# Altium PCB SurfaceControlSystem.PcbDoc
Units mil, origin at the board's own origin, x right, y up, seen from the top; angles counter-clockwise.
Board outline 3543.31 x 5842.52 mil, 2 copper layers (Top Layer, Bottom Layer); 136 components, 62 nets, 417 pads, 47 vias.
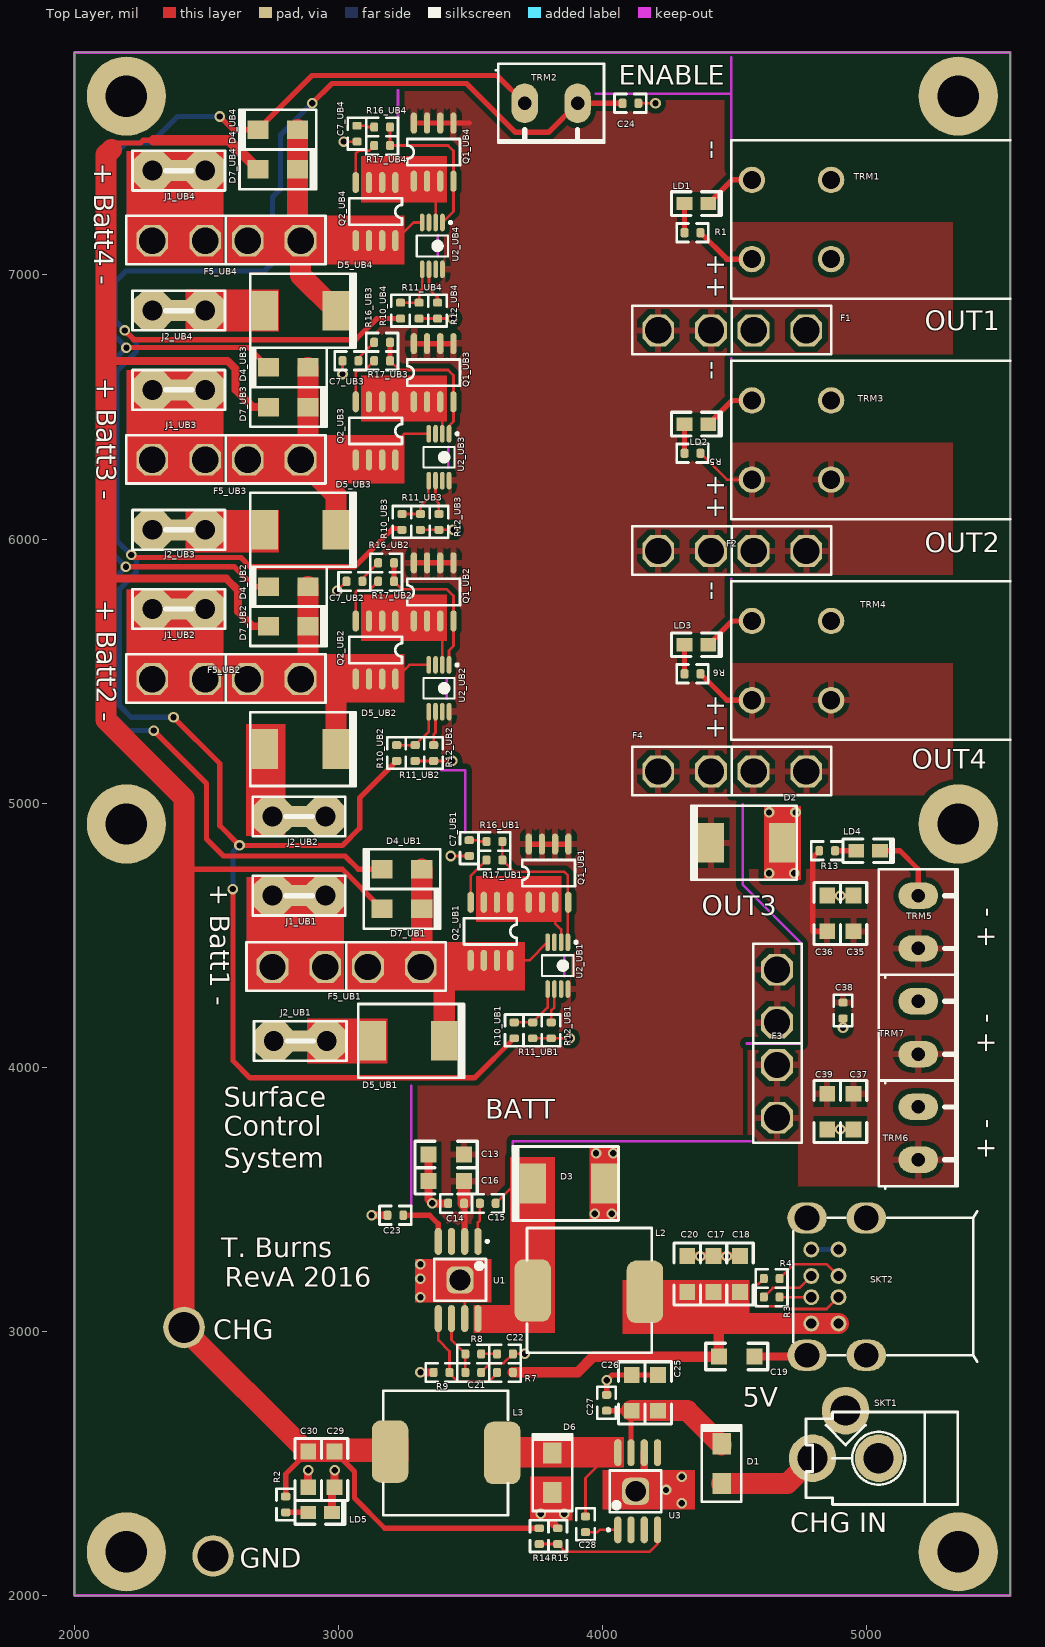
[diagram p0: Top Layer view]
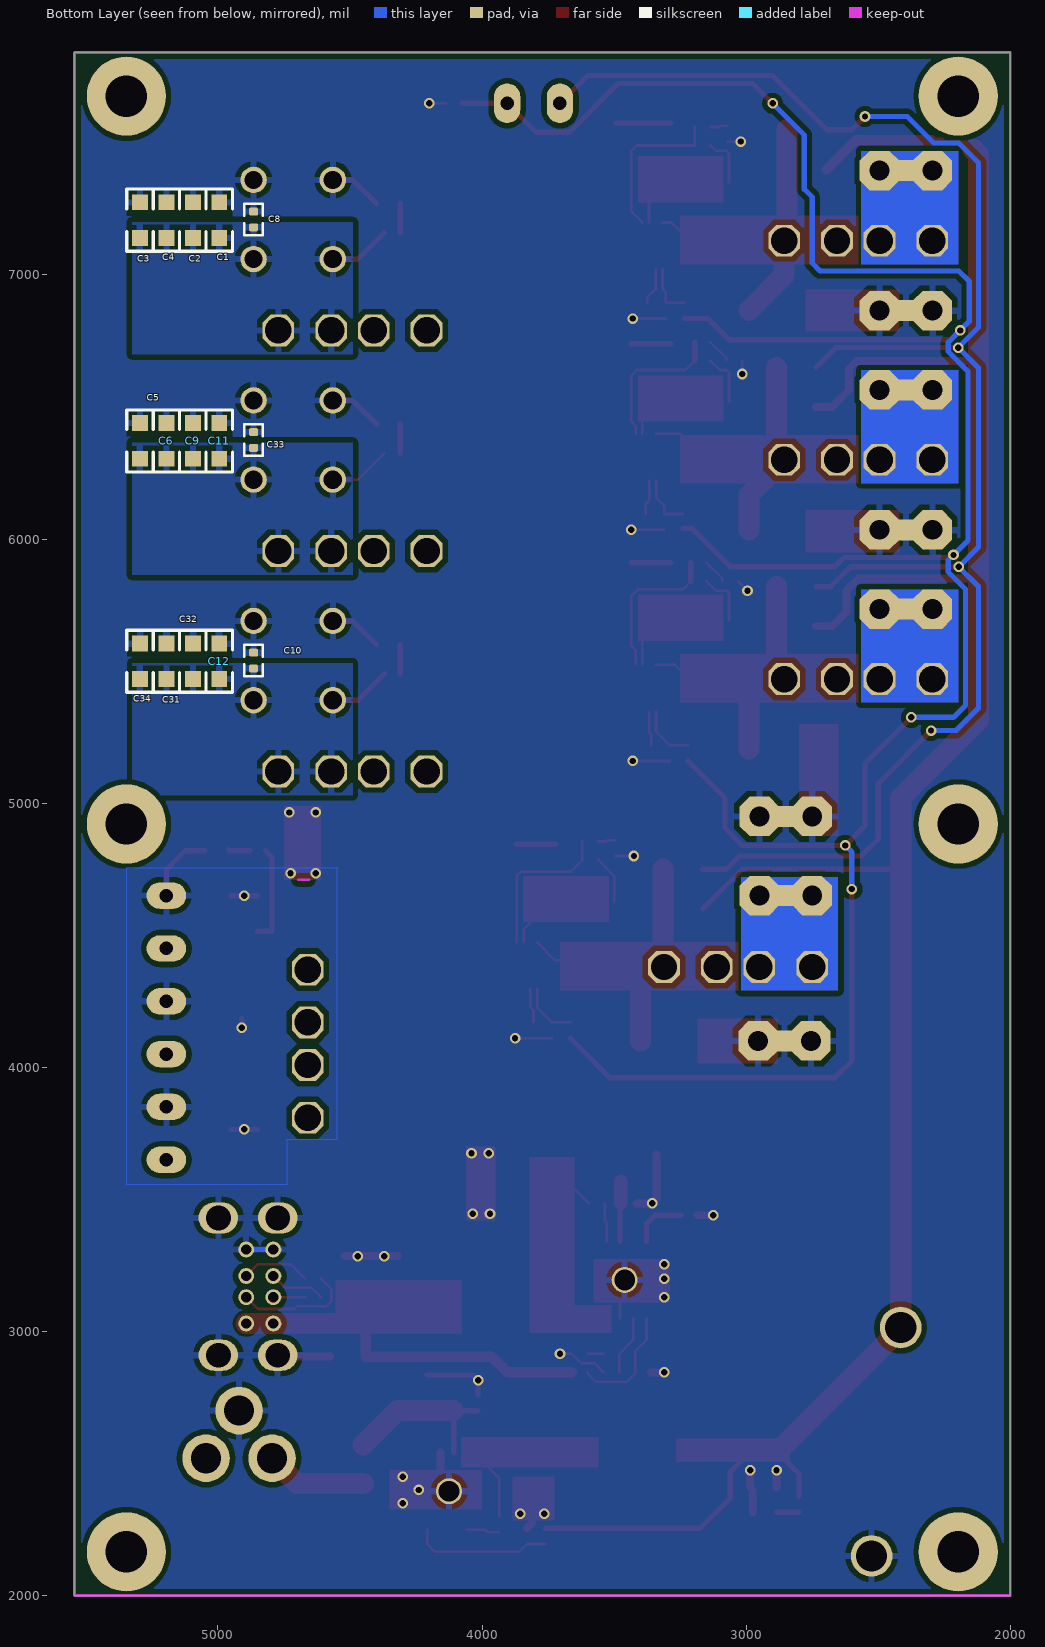
[diagram p1: Bottom Layer view, seen from below]

## Layer stack, top to bottom
Top Layer: signal copper 1.4
Dielectric: core 12.6, FR-4, Dk 4.8
Bottom Layer: signal copper 1.4

## Board outline
2000,2000 2000,7842.52 5543.31,7842.52 5543.31,2000

## Design rules (kind name [scope] priority, off if disabled: settings)
Clearance Clearance_poly [InPoly] p1: gap=20
Clearance [All] p2: gap=7
ComponentClearance [All] p1 off: gap=10 collisioncheckmode=3 verticalgap=10 showdistances=FALSE
HoleSize [All] p1: absolutevalues=TRUE maxlimit=300 minlimit=24 maxpercent=80.000 minpercent=20.000
MinimumAnnularRing [All] p1: minimumring=8
PlaneClearance [All] p1: clearance=12
PlaneConnect [All] p1: planeconnectstyle=Relief reliefexpansion=25 reliefentries=4 reliefconductorwidth=10 reliefairgap=10
PolygonConnect PolygonConnect_via [IsVia] p1: connectstyle=Direct reliefconductorwidth=10 reliefentries=4 polygonreliefangle="90 Angle"
PolygonConnect [All] p2: connectstyle=Relief reliefconductorwidth=25 reliefentries=4 polygonreliefangle="90 Angle"
RoutingVias [All] p1: holewidth=24 width=40 viastyle="Through Hole" minholewidth=24 minwidth=35 maxholewidth=28 maxwidth=50
SolderMaskExpansion [All] p1: expansion=4
TestPointUsage [All] p1: valid=0 allowmultiple=FALSE
Testpoint [All] p1: side=3 testpointundercomponent=TRUE minsize=40 maxsize=100 preferedsize=60 minholesize=0 maxholesize=40 preferedholesize=32 testpointgrid=1 style=297 order=0-112345678
Width [All] p1: maxlimit=300 minlimit=10 preferedwidth=10
15 further rules are at their usual default settings.

## Classes and differential pairs
channel class SCS_Battery_RevA: UB1 UB2 UB3 UB4

## Components (designator, comment, footprint, x,y, rotation, side; value= is the part's Value field where it differs from the comment)
C1 "10UF 25V" 1206 4995,7140 r90 bottom
C2 "10UF 50V" 1206 5095,7140 r90 bottom
C3 "10UF 25V" 1206 5295,7140 r90 bottom
C4 "10UF 25V" 1206 5195,7140 r90 bottom
C5 "10UF 25V" 1206 5295.02,6304.29 r90 bottom
C6 "10UF 25V" 1206 5195.02,6304.29 r90 bottom
C7_UB1 "10NF 50V" 0603 3495,4860 r270 top (schematic designator C7)
C7_UB2 "10NF 50V" 0603 3090,5840 r180 top (schematic designator C7)
C7_UB3 "10NF 50V" 0603 3075,6675 r180 top (schematic designator C7)
C7_UB4 "10NF 50V" 0603 3070,7565 r270 top (schematic designator C7)
C8 "100nF 50V" 0603 4865,7180 r90 bottom
C9 "10UF 25V" 1206 5095.02,6304.29 r90 bottom
C10 "100nF 50V" 0603 4865,5510 r90 bottom
C11 "10UF 25V" 1206 4995.02,6304.29 r90 bottom
C12 "10UF 25V" 1206 4995,5470 r90 bottom
C13 "10UF 25V" 1206 3475,3670 r180 top
C14 "10NF 50V" 0603 3475,3485 r180 top
C15 "100nF 50V" 0603 3535,3485 r0 top
C16 "10UF 25V" 1206 3475,3570 r180 top
C17 "10UF 25V" 1206 4420,3150 r90 top
C18 "10UF 25V" 1206 4520,3150 r90 top
C19 "10UF 25V" 1206 4440,2905 r0 top
C20 "10UF 25V" 1206 4320,3150 r90 top
C21 "22PF 100V" 0603 3480,2845 r0 top
C22 "1nF 50V" 0603 3600,2915 r0 top
C23 "10NF 50V" 0603 3245,3440 r180 top
C24 "100nF 50V" 0603 4075,7650 r0 top
C25 "10UF 25V" 1206 4210,2700 r90 top
C26 "10UF 25V" 1206 4110,2700 r90 top
C27 "100nF 50V" 0603 4015,2700 r90 top
C28 "10NF 50V" 0603 3935,2240 r90 top
C29 "10UF 25V" 1206 2985,2545 r270 top
C30 "10UF 25V" 1206 2885,2545 r270 top
C31 "10UF 25V" 1206 5195,5470 r90 bottom
C32 "10UF 25V" 1206 5095,5470 r90 bottom
C33 "100nF 50V" 0603 4865,6345 r90 bottom
C34 "10UF 25V" 1206 5295.01,5470.01 r90 bottom
C35 "10UF 25V" 1206 4950,4515 r90 top
C36 "10UF 25V" 1206 4850,4515 r90 top
C37 "10UF 25V" 1206 4950,3900 r270 top
C38 "100nF 50V" 0603 4910,4245 r270 top
C39 "10UF 25V" 1206 4850,3900 r270 top
D1 "DIODE_SS14" DO-214AC 4450,2425 r270 top
D2 "TVS 15V" DO-214AB 4545,4850 r0 top
D3 "DIODE_SSC54" DO-214AB 3870,3560 r0 top
D4_UB1 "DIODE_SS14" DO-214AC 3315,4750 r0 top (schematic designator D4)
D4_UB2 "DIODE_SS14" DO-214AC 2885,5820 r0 top (schematic designator D4)
D4_UB3 "DIODE_SS14" DO-214AC 2885,6650 r0 top (schematic designator D4)
D4_UB4 "DIODE_SS14" DO-214AC 2845,7550 r0 top (schematic designator D4)
D5_UB1 "TVS 15V" DO-214AB 3265,4100 r180 top (schematic designator D5)
D5_UB2 "TVS 15V" DO-214AB 2855,5205 r180 top (schematic designator D5)
D5_UB3 "TVS 15V" DO-214AB 2855,6035 r180 top (schematic designator D5)
D5_UB4 "TVS 15V" DO-214AB 2855,6865 r180 top (schematic designator D5)
D6 "DIODE_SS14" DO-214AC 3810,2390 r270 top
D7_UB1 "DIODE_SS14" DO-214AC 3165,4600 r180 top (schematic designator D7)
D7_UB2 "DIODE_SS14" DO-214AC 2735,5670 r180 top (schematic designator D7)
D7_UB3 "DIODE_SS14" DO-214AC 2735,6500 r180 top (schematic designator D7)
D7_UB4 "DIODE_SS14" DO-214AC 2695,7400 r180 top (schematic designator D7)
F1 "BLADE FUSE" FUSEHOLDER_BLADE 4210,6790 r0 top
F2 "BLADE FUSE" FUSEHOLDER_BLADE 4210,5955 r0 top
F3 "BLADE FUSE" FUSEHOLDER_BLADE 4660,4370 r270 top
F4 "BLADE FUSE" FUSEHOLDER_BLADE 4210,5120 r0 top
F5_UB1 "BLADE FUSE" FUSEHOLDER_BLADE 2750,4380 r0 top (schematic designator F5)
F5_UB2 "BLADE FUSE" FUSEHOLDER_BLADE 2295,5470 r0 top (schematic designator F5)
F5_UB3 "BLADE FUSE" FUSEHOLDER_BLADE 2295,6300 r0 top (schematic designator F5)
F5_UB4 "BLADE FUSE" FUSEHOLDER_BLADE 2295,7130 r0 top (schematic designator F5)
J1_UB1 "5mm Pitch 6.3mm SPADE" CON_5mm_6.3MM_SPADE 2950,4650 r90 top (schematic designator J1)
J1_UB2 "5mm Pitch 6.3mm SPADE" CON_5mm_6.3MM_SPADE 2495,5735 r90 top (schematic designator J1)
J1_UB3 "5mm Pitch 6.3mm SPADE" CON_5mm_6.3MM_SPADE 2495,6565 r90 top (schematic designator J1)
J1_UB4 "5mm Pitch 6.3mm SPADE" CON_5mm_6.3MM_SPADE 2495,7395 r90 top (schematic designator J1)
J2_UB1 "5mm Pitch 6.3mm SPADE" CON_5mm_6.3MM_SPADE 2955,4100 r90 top (schematic designator J2)
J2_UB2 "5mm Pitch 6.3mm SPADE" CON_5mm_6.3MM_SPADE 2950,4950 r90 top (schematic designator J2)
J2_UB3 "5mm Pitch 6.3mm SPADE" CON_5mm_6.3MM_SPADE 2495,6035 r90 top (schematic designator J2)
J2_UB4 "5mm Pitch 6.3mm SPADE" CON_5mm_6.3MM_SPADE 2495,6865 r90 top (schematic designator J2)
L2 "4.7uH 6A2" Wurth744771156 3950,3155 r270 top
L3 "56uH 2A" Wurth744771156 3405,2540 r90 top
LD1 "Green LED 0805" 0805DIODE 4400,7270 r180 top
LD2 "Green LED 0805" 0805DIODE 4400,6435 r180 top
LD3 "Green LED 0805" 0805DIODE 4400,5600 r180 top
LD4 "Green LED 0805" 0805DIODE 5050,4820 r180 top
LD5 "Green LED 0805" 0805DIODE 2975,2315 r180 top
Q1_UB1 "N Channel FET" SO-8 3720,4625 r90 top (schematic designator Q1)
Q1_UB2 "N Channel FET" SO-8 3285,5690 r90 top (schematic designator Q1)
Q1_UB3 "N Channel FET" SO-8 3285,6520 r90 top (schematic designator Q1)
Q1_UB4 "N Channel FET" SO-8 3285,7355 r90 top (schematic designator Q1)
Q2_UB1 "N Channel FET" SO-8 3650,4625 r270 top (schematic designator Q2)
Q2_UB2 "N Channel FET" SO-8 3215,5690 r270 top (schematic designator Q2)
Q2_UB3 "N Channel FET" SO-8 3215,6520 r270 top (schematic designator Q2)
Q2_UB4 "N Channel FET" SO-8 3215,7350 r270 top (schematic designator Q2)
R1 "1K 1%" 0603 4310,7160 r0 top
R2 "1K 1%" 0603 2800,2315 r90 top
R3 "220R 1%" 0603 4610,3130 r0 top
R4 "220R 1%" 0603 4670,3200 r180 top
R5 "1K 1%" 0603 4310,6325 r0 top
R6 "1K 1%" 0603 4310,5490 r0 top
R7 "10K2 1%" 0603 3600,2845 r0 top
R8 "45K3R 1%" 0603 3540,2915 r180 top
R9 "1K96 1%" 0603 3420,2845 r180 top
R10_UB1 "1K 1%" 0603 3665,4110 r90 top (schematic designator R10)
R10_UB2 "1K 1%" 0603 3220,5160 r90 top (schematic designator R10)
R10_UB3 "1K 1%" 0603 3240,6035 r90 top (schematic designator R10)
R10_UB4 "1K 1%" 0603 3235,6835 r90 top (schematic designator R10)
R11_UB1 "100K 1%" 0603 3735,4110 r90 top (schematic designator R11)
R11_UB2 "100K 1%" 0603 3290,5160 r90 top (schematic designator R11)
R11_UB3 "100K 1%" 0603 3310,6035 r90 top (schematic designator R11)
R11_UB4 "100K 1%" 0603 3305,6835 r90 top (schematic designator R11)
R12_UB1 "1K 1%" 0603 3805,4110 r90 top (schematic designator R12)
R12_UB2 "1K 1%" 0603 3360,5160 r90 top (schematic designator R12)
R12_UB3 "1K 1%" 0603 3380,6035 r90 top (schematic designator R12)
R12_UB4 "1K 1%" 0603 3375,6835 r90 top (schematic designator R12)
R13 "1K 1%" 0603 4880,4820 r180 top
R14 "1K 1%" 0603 3760,2195 r90 top
R15 "590R 1%" 0603 3830,2255 r270 top
R16_UB1 "10K 1%" 0603 3560,4855 r0 top (schematic designator R16)
R16_UB2 "10K 1%" 0603 3150,5910 r0 top (schematic designator R16)
R16_UB3 "10K 1%" 0603 3135,6745 r0 top (schematic designator R16)
R16_UB4 "10K 1%" 0603 3135,7560 r0 top (schematic designator R16)
R17_UB1 "10R 1%" 0603 3620,4785 r180 top (schematic designator R17)
R17_UB2 "10R 1%" 0603 3210,5840 r180 top (schematic designator R17)
R17_UB3 "10R 1%" 0603 3195,6675 r180 top (schematic designator R17)
R17_UB4 "10R 1%" 0603 3195,7490 r180 top (schematic designator R17)
SKT1 "DC Socket" SKT_PWR 4795,2520 r180 top
SKT2 "USB A Double Socket" USB_A_DoubleSocket 4790,3030 r0 top
TRM1 "2way screw terminal, High current" TERM_2POS_HORIZ_7.62MM 4865,7060 r90 top locked
TRM2 "Wurth 2way screw terminal" TERM_2POS_HORIZ_5.08MM 3705,7650 r0 top
TRM3 "2way screw terminal, High current" TERM_2POS_HORIZ_7.62MM 4865,6225 r90 top locked
TRM4 "2way screw terminal, High current" TERM_2POS_HORIZ_7.62MM 4865,5390 r90 top locked
TRM5 "Wurth 2way screw terminal" TERM_2POS_HORIZ_5.08MM 5195,4450 r90 top
TRM6 "Wurth 2way screw terminal" TERM_2POS_HORIZ_5.08MM 5195,3650 r90 top
TRM7 "Wurth 2way screw terminal" TERM_2POS_HORIZ_5.08MM 5195,4050 r90 top
U1 "TPS54531DDA" PSOP-8 3460,3195 r270 top
U2_UB1 "LTC4359CMS8#PBF" TSOP65P490X110-8M 3830,4385 r270 top (schematic designator U2)
U2_UB2 "LTC4359CMS8#PBF" TSOP65P490X110-8M 3380,5435 r270 top (schematic designator U2)
U2_UB3 "LTC4359CMS8#PBF" TSOP65P490X110-8M 3380,6310 r270 top (schematic designator U2)
U2_UB4 "LTC4359CMS8#PBF" TSOP65P490X110-8M 3355,7110 r270 top (schematic designator U2)
U3 "Buck Reg" PSOP-8 4125,2395 r90 top

## Footprints (in the part's own frame and the unit in brackets; to place one, negate y for a bottom-side part, rotate by r counter-clockwise, add the part's x,y. Pads: shape width x height; smd on the part's side, far side on the other; paste and mask are expansions set on the pad)
0603 [mil]
  rrect50% 30x35 smd: 1(0,0) 2(60,0)
  silkscreen extent -30,-35 90,35
0805DIODE [mil]
  rect 60x50 smd: A(90,0) K(0,0)
  silkscreen extent -50,-45 140,45
1206 [mil]
  rect 60x60 smd: 1(0,0) 2(135,0)
  silkscreen extent -50,-50 185,50
CON_5mm_6.3MM_SPADE [mil]
  oct 150x150 hole 75: 1(0,200) 1(0,0)
  rect 80x200 smd: 1(0,100)
  rect 80x200 smd far side: 1(0,100)
  silkscreen extent -75,-75 75,275
DO-214AB [mil]
  rect 100x150 smd: A(135,0) K(-135,0)
  silkscreen extent -210,-140 190,140
DO-214AC [mil]
  rect 80x70 smd: A(0,0) K(-150,0)
  silkscreen extent -220,-75 70,75
FUSEHOLDER_BLADE [mil]
  oct 120x120 hole 100: 1(0,0) 1(200,0) 2(361.22,0) 2(561.22,0)
  silkscreen extent -98,-90 656,94
PSOP-8 [mm]
  oval 2.6x0.7 smd: 1(-3.711,1.717) 2(-3.711,0.447) 3(-3.711,-0.823) 4(-3.711,-2.093) 5(3.711,-2.093) 6(3.711,-0.823) 7(3.711,0.447) 8(3.711,1.717)
  rrect50% 2.6x2.6 smd: 9(0,0)
  silkscreen extent -3.84,-2.47 1.99,2.74
SKT_PWR [mil]
  round 180 hole 114: COM(-250,0) PIN(0,0) SW(-125,-180)
  silkscreen extent -550,-175 25,175
SO-8 [mil]
  oval 80x24 smd: 1(0,0) 2(0,-50) 3(0,-100) 4(0,-150) 5(220,-150) 6(220,-100) 7(220,-50) 8(220,0)
  silkscreen extent 60,-175 160,25
TERM_2POS_HORIZ_5.08MM [mil]
  oval 100x150 hole 51: 1(0,0) 2(200,0)
  silkscreen extent -110,-150 300,150
TERM_2POS_HORIZ_7.62MM [mm]
  round 2.54 hole 1.75: 1(0,7.62) 1(0,0) 2(7.62,0) 2(7.62,7.62)
  silkscreen extent -3.81,-17.23 11.43,9.62
TSOP65P490X110-8M [mm] "TSOP, 8-Leads, Body 3.0x3.0mm (max), Pitch 0.65mm, IPC Low Density"
  oval 1.7x0.45 smd: 1(-2.25,0.975) 2(-2.25,0.325) 3(-2.25,-0.325) 4(-2.25,-0.975) 5(2.25,-0.975) 6(2.25,-0.325) 7(2.25,0.325) 8(2.25,0.975)
  silkscreen extent -2.37,-1.5 1,1.88, body extent -1.5,-1.5 1.5,1.5, height 1.1
USB_A_DoubleSocket [mil]
  round 60 hole 39: 1(0,0) 2(0,100) 3(0,180) 4(0,280) 5(103.15,0) 6(103.15,100) 7(103.15,180) 8(103.15,280)
  oval 150x118.11 hole 94: 9(208.15,-120) 10(-16.26,-120) 11(-16.26,400) 12(208.15,400)
  silkscreen extent -68,-145 628,425
Wurth744771156 [mm]
  rrect50% 6x3.5 smd: 1(0,-5.461) 2(0.127,5.334)
  silkscreen extent -6.01,-6.01 5.99,5.99

## Part data
C1 C2 C3 C4 C13 C16 C17 C18 C19 C20 C25 C29 C30 C31 C32 C35 C36 C37 C39: library part CAP_10UF_50V_10%_1206, "CAP CER 10UF 50V 10% X5R 1206"
C5 C33 C34: library part CAP_220UF_35V_20%, "CAP CER 220UF 35V 20%"
C6 C9 C11 C12: library part CAP_10UF_25V_10%_1206, "CAP CER 10UF 25V 10% X5R 1206"
C7_UB1 C7_UB2 C7_UB3 C7_UB4 C14 C23 C26 C28: library part CAP_10NF_50V_10%_0603, "CAP CER 10NF 50V 10% X7R 0603"
C8 C10 C15 C24 C27 C38: library part CAP_100NF_50V_10%_0603, "CAP CER 100nF 50V 10% X7R 0603"
C21: library part CAP_22PF_100V_5%_0603, "CAP CER 22PF 100V 5% NP0 0603"
C22: library part CAP_1NF_50V_10%_0603, "CAP CER 1nF 50V 10% X7R 0603"
D1 D4_UB1 D4_UB2 D4_UB3 D4_UB4 D6: "Schottky Diode, 1A, 40V SS14"
D2: library part DIODE_TVS_SMCJ15A, "TVS Diode, 15V"
D3: "Schottky Diode, 5A, 40V SSC54, DO214AB"
D5_UB1 D5_UB2 D5_UB3 D5_UB4 D7_UB1 D7_UB2 D7_UB3 D7_UB4: library part DIODE_SSC54, "Schottky Diode, 5A, 40V SSC54, DO214AB"
F1 F2 F3 F4 F5_UB1 F5_UB2 F5_UB3 F5_UB4: library part FUSE_BLADE_500V_30A_PCB, "FUSE CLIP BLADE 500V 30A PCB"
J1_UB1 J1_UB2 J1_UB3 J1_UB4 J2_UB1 J2_UB2 J2_UB3 J2_UB4: library part CON_5mm_6.3MM_SPADE, "CON_5mm_6.3MM_SPADE"
L2: library part IND_4.7uH_6A2, "FIXED IND 4.7UH 6.2A 34 MOHM"
L3: library part IND_56uH_2.01A, "FIXED IND 56UH 2.01A 110 MOHM"
LD1 LD2 LD3 LD4 LD5: library part LED_Green_0805, "WL-SMCW SMD CHIP LED WATERCLEAR"
Q1_UB1 Q1_UB2 Q1_UB3 Q1_UB4 Q2_UB1 Q2_UB2 Q2_UB3 Q2_UB4: library part Q_STS26N3LLH6, "MOSFET N-CH 30V 26A LFPAK"
R1 R2 R5 R9 R13: library part RES_1K96_1%_0603, "Resistor, 1K96, 1%, 0603"
R3 R4: library part RES_220R_1%_0603, "Resistor, 220R, 1%, 0603"
R6 R10_UB1 R10_UB2 R10_UB3 R10_UB4 R12_UB1 R12_UB2 R12_UB3 R12_UB4 R14: library part RES_1K_1%_0603, "Resistor, 1K, 1%, 0603"
R7: library part RES_10K2_1%_0603, "Resistor, 10K2, 1%, 0603"
R8: library part RES_45K3_1%_0603, "Resistor, 45K3, 1%, 0603"
R11_UB1 R11_UB2 R11_UB3 R11_UB4: library part RES_100K_1%_0603, "Resistor, 100K, 1%, 0603"
R15: library part RES_590R_1%_0603, "Resistor, 590R, 1%, 0603"
R16_UB1 R16_UB2 R16_UB3 R16_UB4: library part RES_10K_1%_0603, "Resistor, 10K, 1%, 0603"
R17_UB1 R17_UB2 R17_UB3 R17_UB4: library part RES_10R_1%_0603, "Resistor, 10R, 1%, 0603"
SKT1: library part SOCKET_DC
SKT2: library part USB_A_Double
TRM1 TRM3 TRM4: library part TRM_2way_ScrewTerminal_7.62mm, "TERM BLOCK 2POS HORIZ 7.62MM T/H"
TRM2 TRM5 TRM6 TRM7: library part TRM_2way_ScrewTerminal, "TERM BLOCK 2POS HORIZ 5.08MM T/H"
U1: library part IC_SMPS_TPS54531, "SMPS"
U2_UB1 U2_UB2 U2_UB3 U2_UB4: library part IC_LTC4359, "Ideal Diode Controller"
U3: library part IC_REG_LM22675, "IC REG BUCK 5V 1A 8SOPWRPAD"

## Free pads (board coordinates)
  round 157.48 hole 118.11: 0(2415,3015) 0(2525,2150)
  round 98.43 hole 78.74: 0(3460,3195) 0(4125,2395)
  round 300 hole 157 paste+0: ""(2196.85,2165.35) ""(2196.85,4921.26) ""(2196.85,7677.17) ""(5346.46,2165.35) ""(5346.46,4921.26) ""(5346.46,7677.17)

## Via types
v1: diameter 40, hole 24, Top Layer to Bottom Layer, tented both sides, 47 vias

## Nets (pads, with @x,y where several pads share a name; then routed paths per layer and width w, separated by ;. In a path a pad name is that pad's centre, name@x,y a point inside that pad or via, vN(x,y) a via of type N, cw(c..) or ccw(c..) an arc to the next point about the centre after c; other vN are vias at no path point)
5V: C17.1 C18.1 C19.1 C20.1 L2.2 R7.2 SKT2.1 SKT2.5 | length 1538
  Top Layer w40: R7.2 3905,2845 3965,2905 C19.1 4440,3030 ; C20.1 C17.1 C18.1
  Top Layer w80: 4485,3030 SKT2.1 SKT2.5
BATT_DIODE: D4_UB1.K D4_UB2.K D4_UB3.K D4_UB4.K TRM2.1 | length 6569
  Top Layer w20: v1(2195,5895) 2605,5895 2617.5,5882.5 ; v1(2196.85,6725) 2660,6725 D4_UB3.K ; v1(2300,5275) 2500,5075 2500,4865 2565,4800 3025,4800 3075,4750 D4_UB1.K ; v1(2550,7600) 2600,7550 D4_UB4.K 2900,7755 3600,7755 TRM2.1 ; 2610,5890 2617.5,5882.5 ; D4_UB2.K 2680,5820 2617.5,5882.5
  Bottom Layer w20: v1(2300,5275) 2205,5275 2120,5360 2120,5820 v1(2195,5895) 2120,5970 2120,6648.15 v1(2196.85,6725) 2120,6801.85 2120,7425 2195,7500 2290,7500 2390,7600 v1(2550,7600)
BATT_EN: C24.1 R10_UB1.1 R10_UB2.1 R10_UB3.1 R10_UB4.1 TRM2.2 | length 10129.4
  Top Layer w20: v1(2190,6790) 2225,6755 3065,6755 3145,6835 R10_UB4.1 ; v1(2215,5940) 2225,5930 2630,5930 2665,5895 3060,5895 3205,6040 R10_UB3.1@3240,6040 ; v1(2375,5325) 2550,5150 2550,4915 v1(2625,4840) 3015,4840 3080,4905 3080,5020 R10_UB2.1 ; v1(2600,4675) 2600,4025 2665,3960 3515,3960 R10_UB1.1 ; v1(2900,7650) 2975,7725 3485,7725 3670,7540 3795,7540 TRM2.2 C24.1
  Bottom Layer w20: v1(2375,5325) 2215,5325 2170,5370 2170,5810 2235,5875 2235,5920 v1(2215,5940) 2160,5995 2160,6635 2235,6710 2235,6745 v1(2190,6790) 2155,6825 2155,6975 2195,7015 2720,7015 2750,7045 2750,7295 2780,7325 2780,7530 v1(2900,7650) ; v1(2600,4675) 2600,4815 v1(2625,4840)
CHG-FB: R14.1 R15.2 U3.4 | length 525.6
  Top Layer w10: R14.1 R15.2 3859.65,2165.35 4177.32,2165.35 4207.41,2195.45 U3.4
CHG_IN: C25.1 C26.1 C27.1 D1.K U3.7 | length 648.8
  Top Layer w20: C27.1 C26.1 4107.41,2697.41 U3.7
  Top Layer w80: C26.1 C25.1 4320,2700 D1.K@4450,2570
GND: C1.2 C2.2 C3.2 C4.2 C5.2 C6.2 C7_UB1.2 C7_UB2.2 C7_UB3.2 C7_UB4.2 C8.2 C9.2 C10.2 C11.2 C12.2 C13.2 C14.2 C16.2 C17.2 C18.2 C19.2 C20.2 C21.2 C22.2 C23.2 C24.2 C25.2 C26.2 C27.2 C29.2 C30.2 C31.2 C32.2 C33.2 C34.2 C35.2 C36.2 C37.2 C38.2 C39.2 D2.A D3.A D5_UB1.A D5_UB2.A D5_UB3.A D5_UB4.A D6.A J2_UB1.1 J2_UB2.1 J2_UB3.1 J2_UB4.1 LD1.K LD2.K LD3.K LD4.K LD5.K pad.0@2525,2150 pad.0@3460,3195 pad.0@4125,2395 R9.2 R11_UB1.1 R11_UB2.1 R11_UB3.1 R11_UB4.1 R12_UB1.1 R12_UB2.1 R12_UB3.1 R12_UB4.1 R15.1 SKT1.SW SKT2.4 SKT2.8 SKT2.9 SKT2.10 SKT2.11 SKT2.12 TRM1.2 TRM3.2 TRM4.2 TRM5.2 TRM6.2 TRM7.2 U1.7 U1.9 U3.6 U3.9 | length 3863.4
  Top Layer w10: v1(2995,5805) C7_UB2.2 ; v1(3015,6625) C7_UB3.2 ; v1(3020,7505) C7_UB4.2 ; R11_UB2.1 R12_UB2.1 v1(3430,5160) ; R11_UB4.1 R12_UB4.1 v1(3430,6835) ; R11_UB3.1 R12_UB3.1 v1(3435,6035) ; v1(3425,4800) C7_UB1.2 ; U1.7 3477.59,3147.59 U1.9@3480,3150 ; C21.2 3575,2880 3625,2880 C22.2 v1(3705,2915) ; R11_UB1.1 R12_UB1.1 v1(3875,4110) ; C24.2 v1(4200,7650)
  Top Layer w20: C27.2 v1(4015,2815) 4035,2835 C26.2 C25.2 ; LD3.K 4490,5690 TRM4.2@4565,5690 ; LD2.K 4490,6525 TRM3.2@4565,6525 ; LD1.K 4490,7360 TRM1.2@4565,7360 ; C39.2 C37.2 ; C36.2 C35.2 ; v1@4910,4140 C38.2 ; LD4.K 5125,4820 5195,4750 TRM5.2
  Top Layer w30: C30.2 v1(2885,2475) ; LD5.K 2975,2400 C29.2 v1(2985,2475) ; v1(3125,3440) C23.2 ; v1(3310,2845) R9.2 ; C13.2 C16.2 3340,3500 v1(3355,3485) C14.2 ; D6.A 3810,2275 R15.1 ; U3.9@4157.41,2410 U3.6 ; C20.2 C17.2 C18.2 ; C19.2 4768.74,2905 SKT2.10
  Bottom Layer w20: SKT2.4 SKT2.8
  other v1: 3765,2310 3855,2310 4300,2350 4240,2400 4300,2450 3310,3130 3310,3200 3310,3255 4370,3285 4470,3285 3970,3445 4035,3445 3975,3675 4040,3675 4900,3765 4910,4150 4900,4650 4630,4735 4725,4735 4630,4965 4730,4965
NetC7_UB1_1: C7_UB1.1 R16_UB1.1 | length 67.1
  Top Layer w10: C7_UB1.1 3525,4860 3530,4855 R16_UB1.1
NetC7_UB2_1: C7_UB2.1 R16_UB2.1 | length 94.9
  Top Layer w10: C7_UB2.1 3090,5850 R16_UB2.1
NetC7_UB3_1: C7_UB3.1 R16_UB3.1 | length 94.9
  Top Layer w10: C7_UB3.1 3075,6685 R16_UB3.1
NetC7_UB4_1: C7_UB4.1 R16_UB4.1 | length 67.1
  Top Layer w10: C7_UB4.1 3100,7565 3105,7560 R16_UB4.1
NetC15_1: C15.1 U1.1 | length 147
  Top Layer w10: U1.1 3527.59,3412.59 3535,3420 C15.1
NetC15_2: C15.2 D3.K L2.1 U1.8 | length 171.1
  Top Layer w10: C15.2 3670,3560 D3.K
NetC21_1: C21.1 R8.2 U1.6 | length 225.6
  Top Layer w10: U1.6 3427.59,2967.41 R8.2 C21.1
NetC22_1: C22.1 R8.1 | length 60
  Top Layer w10: R8.1 C22.1
NetC23_1: C23.1 U1.4 | length 212.4
  Top Layer w20: C23.1 3345,3440 3377.59,3407.41 U1.4
NetC28_1: C28.1 U3.1 | length 126.1
  Top Layer w10: C28.1 3980,2240 3988.9,2248.9 U3.1
NetC28_2: C28.2 D6.K L3.1 U3.8 | length 307.2
  Top Layer w10: C28.2 3935,2445 4031.1,2541.1 U3.8
NetD1_A: D1.A SKT1.PIN | length 384.4
  Top Layer w80: D1.A 4700,2425 SKT1.PIN
NetF5_UB1_1: F5_UB1.1 J1_UB1.1
NetF5_UB2_1: F5_UB2.1 J1_UB2.1
NetF5_UB3_1: F5_UB3.1 J1_UB3.1
NetF5_UB4_1: F5_UB4.1 J1_UB4.1
NetLD1_A: LD1.A R1.1 | length 110
  Top Layer w20: R1.1 LD1.A
NetLD2_A: LD2.A R5.1 | length 110
  Top Layer w20: R5.1 LD2.A
NetLD3_A: LD3.A R6.1 | length 110
  Top Layer w20: R6.1 LD3.A
NetLD4_A: LD4.A R13.1 | length 82.1
  Top Layer w20: R13.1 4955,4820 LD4.A@4960,4825
NetLD5_A: LD5.A R2.1 | length 85
  Top Layer w20: R2.1 LD5.A
NetQ1_UB1_1: Q1_UB1.1 Q1_UB1.2 Q1_UB1.3 Q2_UB1.1 Q2_UB1.2 Q2_UB1.3 U2_UB1.2 | length 160.9
  Top Layer w10: Q1_UB1.3 3820,4545 3842.8,4522.2 U2_UB1.2
NetQ1_UB1_4: Q1_UB1.4 R16_UB1.2 R17_UB1.1 U2_UB1.1 | length 597.9
  Top Layer w10: R16_UB1.2 R17_UB1.1 3665,4740 3855,4740 3868.39,4726.61 Q1_UB1.4@3868.39,4623.39 ; U2_UB1.1 Q1_UB1.4@3868.39,4623.39 ; Q1_UB1.4 Q1_UB1.4@3868.39,4623.39
NetQ1_UB2_1: Q1_UB2.1 Q1_UB2.2 Q1_UB2.3 Q2_UB2.1 Q2_UB2.2 Q2_UB2.3 U2_UB2.2 | length 127.3
  Top Layer w10: U2_UB2.2 3392.8,5647.8 3395,5650
NetQ1_UB2_4: Q1_UB2.4 R16_UB2.2 R17_UB2.1 U2_UB2.1 | length 586.1
  Top Layer w10: R17_UB2.1 3240,5810 3410,5810 3435,5785 Q1_UB2.4 3435,5595 3418.39,5578.39 U2_UB2.1
  Top Layer w20: R17_UB2.1 R16_UB2.2
NetQ1_UB3_1: Q1_UB3.1 Q1_UB3.2 Q1_UB3.3 Q2_UB3.1 Q2_UB3.2 Q2_UB3.3 U2_UB3.2 | length 124.6
  Top Layer w10: Q1_UB3.3 3385,6460 3392.8,6452.2 U2_UB3.2
NetQ1_UB3_4: Q1_UB3.4 R16_UB3.2 R17_UB3.1 U2_UB3.1 | length 561.1
  Top Layer w10: R17_UB3.1 3230,6640 3415,6640 3435,6620 Q1_UB3.4 3435,6445 3418.39,6428.39 U2_UB3.1
  Top Layer w20: R17_UB3.1 R16_UB3.2
NetQ1_UB4_1: Q1_UB4.1 Q1_UB4.2 Q1_UB4.3 Q2_UB4.1 Q2_UB4.2 Q2_UB4.3 U2_UB4.2 | length 97.6
  Top Layer w10: 3365,7295 3367.8,7292.2 U2_UB4.2
NetQ1_UB4_4: Q1_UB4.4 R16_UB4.2 R17_UB4.1 U2_UB4.1 | length 606.9
  Top Layer w10: R16_UB4.2 R17_UB4.1 3415,7490 3435,7470 Q1_UB4.4 3435,7240.2 U2_UB4.1
NetQ2_UB1_4: Q2_UB1.4 R17_UB1.2 | length 184.9
  Top Layer w10: Q2_UB1.4 3500,4725 R17_UB1.2
NetQ2_UB2_4: Q2_UB2.4 R17_UB2.2 | length 211.6
  Top Layer w10: Q2_UB2.4 3065,5800 3070,5805 3115,5805 R17_UB2.2
NetQ2_UB3_4: Q2_UB3.4 R17_UB3.2 | length 198.6
  Top Layer w10: Q2_UB3.4 3065,6630 3075,6640 3100,6640 R17_UB3.2
NetQ2_UB4_4: Q2_UB4.4 R17_UB4.2 | length 192.4
  Top Layer w10: Q2_UB4.4 3065,7460 3075,7470 3115,7470 R17_UB4.2
NetR3_1: R3.1 SKT2.3 | length 213.1
  Top Layer w10: R3.1 4645,3165 4745,3165 SKT2.3
NetR3_2: R3.2 SKT2.2 | length 120
  Top Layer w10: R3.2 SKT2.2
NetR4_1: R4.1 SKT2.7 | length 264.6
  Top Layer w10: R4.1 4725,3255 4848.15,3255 SKT2.7
NetR4_2: R4.2 SKT2.6 | length 455.8
  Top Layer w10: R4.2 4570,3160 4570,3115 4590,3095 4700,3095 4710,3085 4848.15,3085 SKT2.6
NetR7_1: R7.1 R9.1 U1.5 | length 436.3
  Top Layer w10: U1.5 3377.59,2967.41 3420,2925 R9.1 3420,2840 3450,2810 3570,2810 3600,2840 R7.1
NetR10_UB1_2: R10_UB1.2 R11_UB1.2 U2_UB1.5 | length 219.9
  Top Layer w10: R10_UB1.2 R11_UB1.2 3791.61,4226.61 U2_UB1.5
NetR10_UB2_2: R10_UB2.2 R11_UB2.2 U2_UB2.5 | length 217.8
  Top Layer w10: R10_UB2.2 R11_UB2.2 3341.61,5271.61 U2_UB2.5
NetR10_UB3_2: R10_UB3.2 R11_UB3.2 U2_UB3.5 | length 209.5
  Top Layer w10: R10_UB3.2 R11_UB3.2 3310,6125 3340,6155 3340,6219.8 U2_UB3.5
NetR10_UB4_2: R10_UB4.2 R11_UB4.2 U2_UB4.5 | length 201.2
  Top Layer w10: R10_UB4.2 R11_UB4.2 3305,6935 3316.61,6946.61 U2_UB4.5
NetR12_UB1_2: R12_UB1.2 U2_UB1.6 | length 131.5
  Top Layer w10: R12_UB1.2 3805,4215 3817.2,4227.2 U2_UB1.6
NetR12_UB2_2: R12_UB2.2 U2_UB2.6 | length 129.4
  Top Layer w10: R12_UB2.2 3360,5260 3367.2,5267.2 U2_UB2.6
NetR12_UB3_2: R12_UB3.2 U2_UB3.6 | length 131.7
  Top Layer w10: U2_UB3.6 3367.2,6147.8 3380,6135 R12_UB3.2
NetR12_UB4_2: R12_UB4.2 U2_UB4.6 | length 140
  Top Layer w10: U2_UB4.6 3342.2,6947.8 3375,6915 R12_UB4.2
OUT_1: C1.1 C2.1 C3.1 C4.1 C8.1 F1.2 R1.2 TRM1.1 | length 236.4
  Top Layer w20: R1.2 4470,7060 TRM1.1@4565,7060
OUT_2: C5.1 C6.1 C9.1 C11.1 C33.1 F2.2 R5.2 TRM3.1 | length 236.4
  Top Layer w10: R5.2 4470,6225 TRM3.1@4565,6225
OUT_3: C35.1 C36.1 C37.1 C38.1 C39.1 F3.2 R13.2 TRM5.1 TRM6.1 TRM7.1 | length 370.4
  Top Layer w20: R13.2 4795,4795 4795,4515 C36.1
OUT_4: C10.1 C12.1 C31.1 C32.1 C34.1 F4.2 R6.2 TRM4.1 | length 236.4
  Top Layer w20: R6.2 4470,5390 TRM4.1@4565,5390
VCC_BATT: C13.1 C14.1 C16.1 D2.K F1.1 F2.1 F3.1 F4.1 Q1_UB1.5 Q1_UB1.6 Q1_UB1.7 Q1_UB1.8 Q1_UB2.5 Q1_UB2.6 Q1_UB2.7 Q1_UB2.8 Q1_UB3.5 Q1_UB3.6 Q1_UB3.7 Q1_UB3.8 Q1_UB4.5 Q1_UB4.6 Q1_UB4.7 Q1_UB4.8 U1.2 U2_UB1.8 U2_UB2.8 U2_UB3.8 U2_UB4.8 | length 890
  Top Layer w20: Q1_UB2.8 Q1_UB2.7 Q1_UB2.6 Q1_UB2.5 ; Q1_UB3.8 Q1_UB3.7 Q1_UB3.6 Q1_UB3.5 ; Q1_UB4.8 Q1_UB4.7 Q1_UB4.6 Q1_UB4.5 3495,7575 ; C14.1 3477.59,3482.41 U1.2 ; Q1_UB1.8 Q1_UB1.7 Q1_UB1.6 Q1_UB1.5
  Top Layer w50: C14.1 C16.1
VCC_CHG: C29.1 C30.1 D7_UB1.A D7_UB2.A D7_UB3.A D7_UB4.A L3.2 pad.0@2415,3015 R2.2 R14.2 | length 9400
  Top Layer w20: 2140.4,7475.4 2165,7500 2250,7500 2260,7510 2300,7510 ; 2415,4750 3015,4750 D7_UB1.A ; R2.2 2800,2460 C30.1 ; C29.1 3060,2470 3060,2415 ; 3060,2450 3060,2415 ; R14.2 3175,2255 3060,2370 3060,2415
  Top Layer w30: 2120,5850 2575,5850 2620,5805 2620,5725 2675,5670 D7_UB2.A ; 2120,6675 2580,6675 2610,6645 2610,6565 2675,6500 D7_UB3.A
  Top Layer w40: 2300,7510 2585,7510 D7_UB4.A
  Top Layer w80: 2120,7330 2120,7280 ; 2140.4,7475.4 2120,7455 2120,7280 ; C30.1 2880,2545 2415,3010 2415,4750 2415,5020 2120,5315 2120,5850 2120,6675 2120,7280
VRAW_UB1: D4_UB1.A D5_UB1.K D7_UB1.K F5_UB1.2 Q2_UB1.5 Q2_UB1.6 Q2_UB1.7 Q2_UB1.8 U2_UB1.4 | length 789.2
  Top Layer w10: Q2_UB1.8 3723.03,4405 U2_UB1.4
  Top Layer w80: D4_UB1.A D7_UB1.K 3315,4425 F5_UB1.2@3325,4415 ; D5_UB1.K 3400,4380
VRAW_UB2: D4_UB2.A D5_UB2.K D7_UB2.K F5_UB2.2 Q2_UB2.5 Q2_UB2.6 Q2_UB2.7 Q2_UB2.8 U2_UB2.4 | length 700.9
  Top Layer w10: Q2_UB2.8 3268.58,5523.58 U2_UB2.4
  Top Layer w80: F5_UB2.2@2885,5490 D7_UB2.K D4_UB2.A ; D5_UB2.K 2990,5420 2995,5425
VRAW_UB3: D4_UB3.A D5_UB3.K D7_UB3.K F5_UB3.2 Q2_UB3.5 Q2_UB3.6 Q2_UB3.7 Q2_UB3.8 U2_UB3.4 | length 830.9
  Top Layer w10: Q2_UB3.8 3215,6365 3248.58,6398.58 U2_UB3.4
  Top Layer w80: F5_UB3.2@2856.22,6300 2990,6166.22 D5_UB3.K ; F5_UB3.2@2885,6345 D7_UB3.K D4_UB3.A
VRAW_UB4: D4_UB4.A D5_UB4.K D7_UB4.K F5_UB4.2 Q2_UB4.5 Q2_UB4.6 Q2_UB4.7 Q2_UB4.8 U2_UB4.4 | length 827.5
  Top Layer w10: Q2_UB4.8 3283.58,7198.58 U2_UB4.4
  Top Layer w80: D4_UB4.A D7_UB4.K 2845,7190 2850,7185 F5_UB4.2@2850,7175 ; F5_UB4.2@2856.22,7130 2856.22,6998.78 D5_UB4.K
pads on no net: SKT1.COM U1.3 U2_UB1.3 U2_UB1.7 U2_UB2.3 U2_UB2.7 U2_UB3.3 U2_UB3.7 U2_UB4.3 U2_UB4.7 U3.2 U3.3 U3.5

## Polygon pours and split planes (outlines as drawn)
OUT_2 on Top Layer "OUT2" (solid, pour order 1003): 4490,6365 4490,5865 4712.67,5865 4925.21,5865 5325,5865 5325,6365
OUT_4 on Top Layer "OUT4" (solid, pour order 1005): 4490,5530 4490,5030 4712.67,5030 4925.21,5030 5325,5030 5325,5530
VCC_BATT on Top Layer "VCC_BATT" (solid, remove dead copper, pour order 1008): 2005,1995 5548.31,1995 5548.31,7837.52 2005,7837.52
no net on Top Layer "OUT1" (solid, pour order 1001): 4490,7200 4490,6700 4712.67,6700 4925.21,6700 5325,6700 5325,7200
OUT_3 on Top Layer "OUT3" (solid, remove dead copper, pour order 1006): 4550,3720 4740,3720 4740,3550 5345,3550 5345,4750 4550,4750
OUT_2 on Bottom Layer "OUT2" (solid, pour order 1002): 4490,6365 4490,5865 4712.67,5865 4925.21,5865 5325,5865 5325,6365
OUT_4 on Bottom Layer "OUT4" (solid, pour order 1004): 4490,5530 4490,5030 4712.67,5030 4925.21,5030 5325,5030 5325,5530
OUT_1 on Bottom Layer "OUT1" (solid, pour order 1000): 4490,7200 4490,6700 4712.67,6700 4925.21,6700 5325,6700 5325,7200
no net on Bottom Layer "G3" (solid, remove dead copper, pour order 1007): 4550,3725 4740,3725 4740,3555 5345,3555 5345,4755 4550,4755
GND on Bottom Layer "GND" (solid, remove dead copper, pour order 1009): 2000,2000 5543.31,2000 5543.31,7842.52 2000,7842.52

## Keep-outs
Top Layer:
  lines w10: 3225,7595 3225,7700 ; 3275,3475 3275,3930 ; 3375,7070.63 3375,7149.37 ; 3390,5125 3480,5125 3480,4890 ; 3410,5395.63 3410,5470.86 3410.85,5470.86 ; 3415,6270.63 3415,6349.37 ; 3660,3680 3660,3720 4080.39,3720 4125.55,3720 4560,3720 ; 3855,4345.63 3855,4424.37 ; 3974.45,7686.26 4485,7686.26 ; 4486.26,5720 4486.26,5850 ; 4486.26,6555 4486.26,6683.74 ; 4486.26,7400 4486.26,7823.74 ; 4530,4760 4530,4691.93 ; 4530,4995 4530,4691.93 ; 4545,4090 4753.5,4090 4753.5,4468.43 4530,4691.93
Bottom Layer:
  lines w10: 4655,4710 4696.47,4710
Keep-Out Layer:
  the board outline again, w10

## Other copper
Top Layer:
  rectangle net NetQ1_UB1_1: 3520,4550 3845,4725
  rectangle net NetQ1_UB2_1: 3085,5615 3410,5790
  rectangle net VRAW_UB1: 3030,4290.43 3705,4475
  rectangle net VRAW_UB2: 2575,5380.43 3250,5565
  rectangle net VRAW_UB3: 2575,6210.43 3250,6395
  rectangle net NetQ1_UB3_1: 3085,6445 3410,6620
  rectangle net VRAW_UB4: 2575,7040.43 3250,7225
  rectangle net NetQ1_UB4_1: 3085,7275 3410,7450
  rectangle net GND: 3950,3420 4060,3700
  rectangle net GND: 2880,4015 3185,4185
  rectangle net GND: 2650,4875 2800,5300
  rectangle net GND: 2420,5950 2775,6110
  rectangle net GND: 2420,6785 2775,6945
  rectangle net NetF5_UB1_1: 2651.57,4290.43 3020,4720
  rectangle net NetF5_UB4_1: 2196.57,7040.43 2565,7470
  rectangle net NetF5_UB3_1: 2196.57,6210.43 2565,6640
  rectangle net NetF5_UB2_1: 2196.57,5380.43 2565,5810
  rectangle net VCC_CHG: 2835,2505 3265,2595
  rectangle net NetC28_2: 3560,2485 4080,2600
  rectangle net NetC15_2: 3510,2995 3820,3100
  rectangle net NetC15_2: 3650,3025 3820,3660
  rectangle net 5V: 4075,2990 4555,3195
  rectangle net GND: 3725,2285 3885,2450
  rectangle net GND: 4000,2325 4350,2475
  rectangle net GND: 3290,3110 3578.18,3275
  rectangle net GND: 4610,4710 4750,4990
Bottom Layer:
  rectangle net NetF5_UB1_1: 2651.57,4290.43 3020,4720
  rectangle net NetF5_UB4_1: 2196.57,7040.43 2565,7470
  rectangle net NetF5_UB3_1: 2196.57,6210.43 2565,6640
  rectangle net NetF5_UB2_1: 2196.57,5380.43 2565,5810

## Silkscreen, mask and mechanical layers (free items; w line width, h text height)
Top Overlay:
  text "ENABLE" at 4060,7720 h75
  text "--" at 4385,7510 h75 r270
  text "+ Batt4 -" at 2075,7425 h75 r270
  text "++" at 4460,6910 h75 r90
  text "OUT1" at 5220,6790 h75
  text "--" at 4385,6675 h75 r270
  text "+ Batt3 -" at 2085,6610 h75 r270
  text "++" at 4460,6075 h75 r90
  text "OUT2" at 5220,5950 h75
  text "--" at 4385,5840 h75 r270
  text "+ Batt2 -" at 2085,5770 h75 r270
  text "++" at 4460,5240 h75 r90
  text "OUT4" at 5170,5130 h75
  text "+ Batt1 -" at 2515,4695 h75 r270
  text "OUT3" at 4375,4575 h75
  text "+ -" at 5485,4450 h75 r90
  text "+ -" at 5485,4050 h75 r90
  text "Surface" at 2565,3850 h75
  text "BATT" at 3555,3805 h75
  text "Control" at 2565,3740 h75
  text "+ -" at 5485,3650 h75 r90
  text "System" at 2565,3620 h75
  text "T. Burns" at 2555,3280 h75
  text "RevA 2016" at 2570,3170 h75
  text "CHG" at 2525,2970 h75
  text "5V" at 4530,2715 h75
  text "CHG IN" at 4710,2240 h75
  text "GND" at 2625,2105 h75
Mechanical 1:
  the board outline again, w10
Mechanical 13:
  lines w10: 5346.46,2165.35 5346.46,7677.17

## Dimensions
2000,2000 to 5543.31,2000 on Mechanical 2
2000,2000 to 2000,7842.52 on Mechanical 2